# Altium PCB PCB4.PcbDoc
Units mm, origin at the board's own origin, x right, y up, seen from the top; angles counter-clockwise.
Board outline 152.4 x 101.6 mm, 2 copper layers (Top Layer, Bottom Layer); 15 components, 16 nets, 71 pads, 10 vias.
Unrouted connection lines stored in the file: 1.
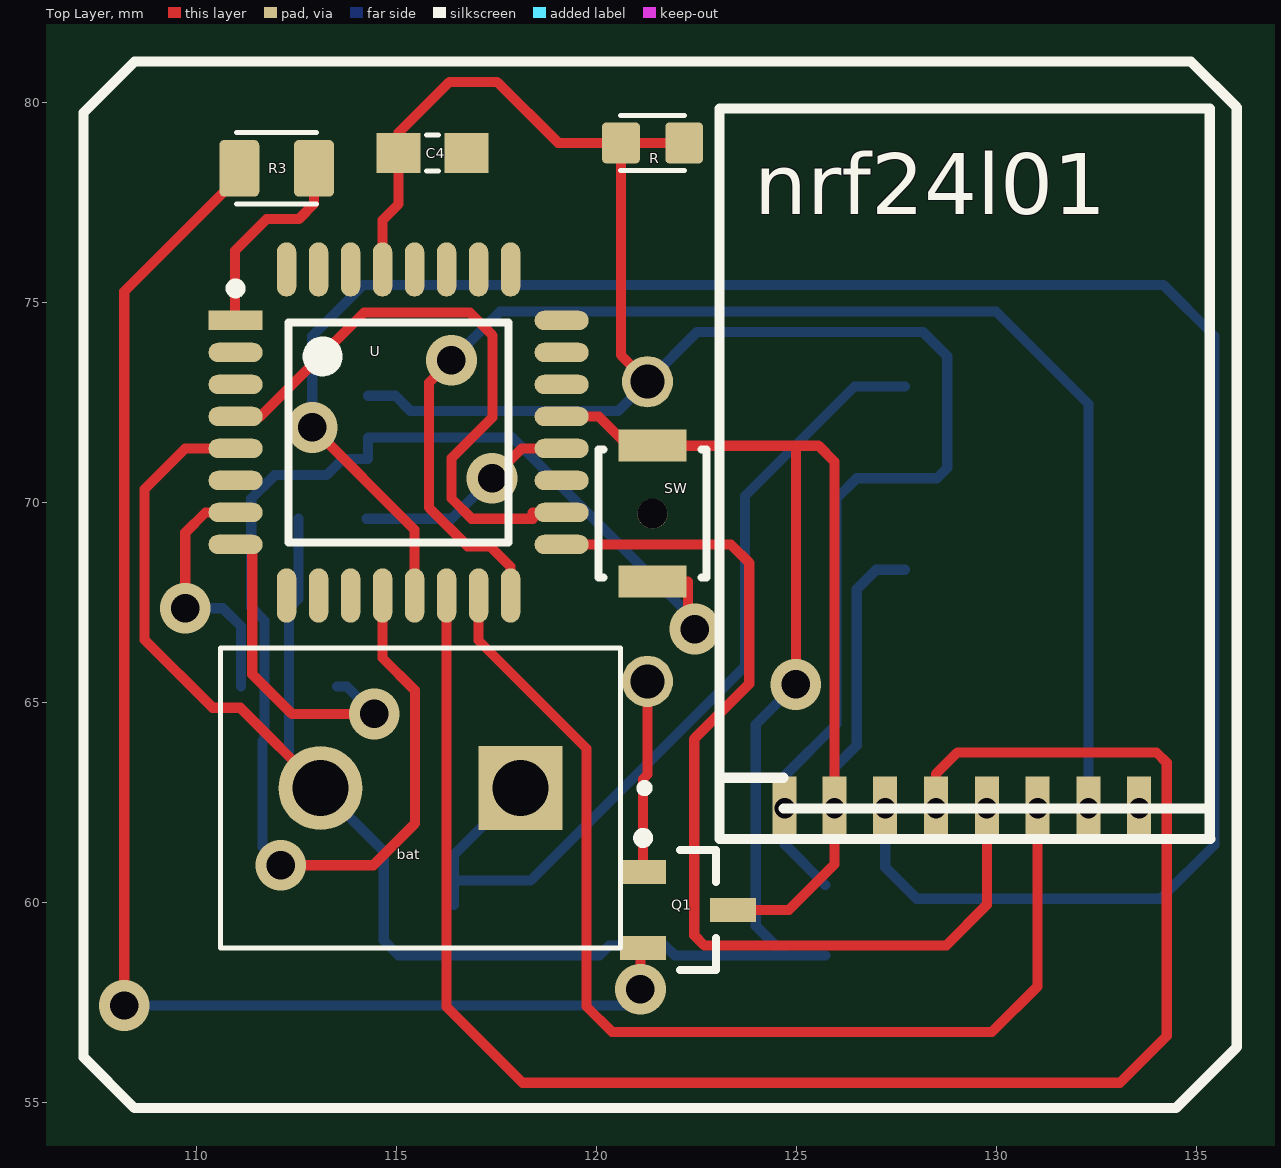
[diagram p0: Top Layer view]
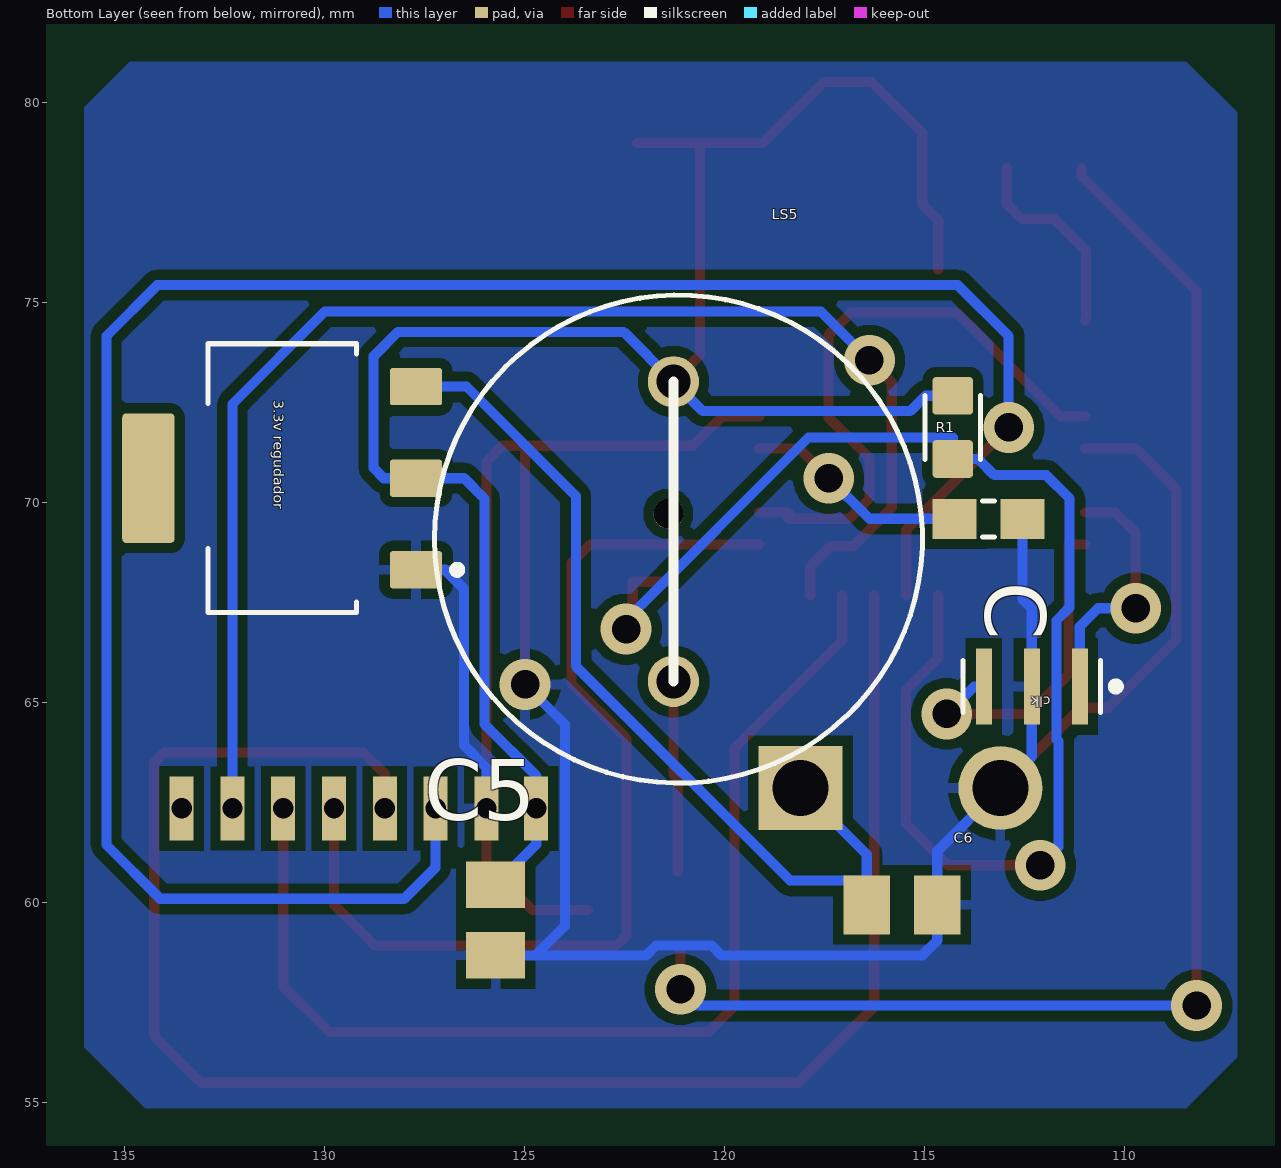
[diagram p1: Bottom Layer view, seen from below]
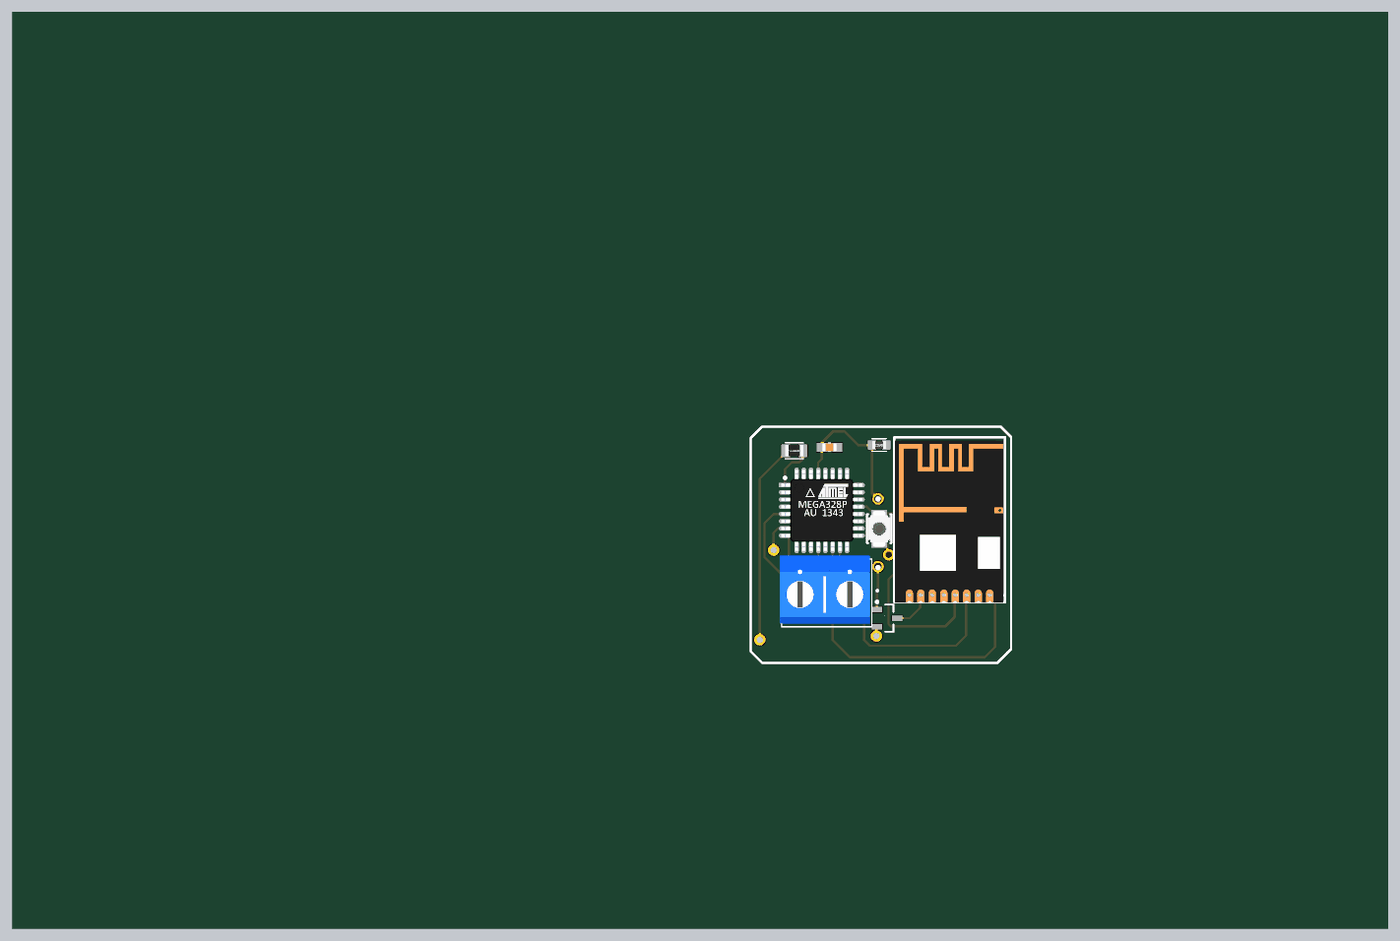
[diagram p2: 3D render of the assembled board from above, using the file's embedded part models]
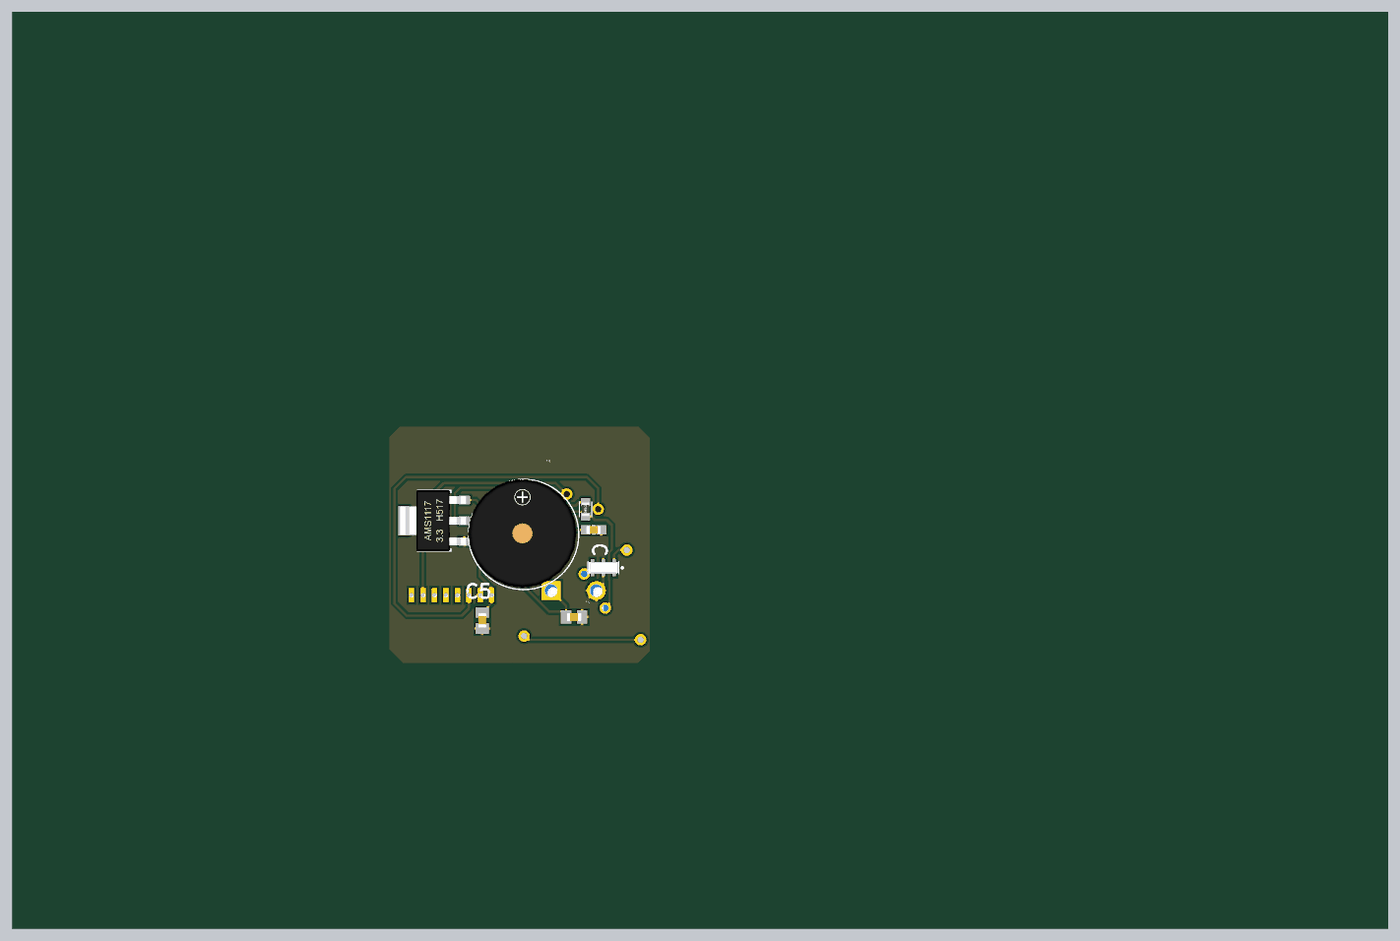
[diagram p3: 3D render of the assembled board from below, using the file's embedded part models]

## Layer stack, top to bottom
Top Solder: solder mask 0.0102, Solder Resist, Dk 3.5
Top Layer: signal copper 0.0356
Dielectric 1: dielectric 0.32, FR-4, Dk 4.8
Bottom Layer: signal copper 0.0356
Bottom Solder: solder mask 0.0102, Solder Resist, Dk 3.5

## Board outline
25.4,25.4 177.8,25.4 177.8,127 25.4,127

## Design rules (kind name [scope] priority, off if disabled: settings)
Clearance [All] p1: gap=0.254 ignorepadtopadclearanceinfootprint=FALSE except(0: Arc-Hole Track-Hole SMDPad-Hole THPad-Hole Via-Hole Fill-Hole Poly-Hole Region-Hole Text-Hole)
PolygonConnect [All] p1: connectstyle=Relief reliefconductorwidth=0.254 reliefentries=4 polygonreliefangle="90 Angle" airgapwidth=0.254
RoutingVias [All] p1: holewidth=0.711 width=1.27 viastyle="Through Hole" minholewidth=0.711 minwidth=1.27 maxholewidth=0.711 maxwidth=1.27
SolderMaskExpansion [All] p1: expansion=0.102 istentingtop=FALSE
Width [All] p1: maxlimit=0.254 minlimit=0.254 preferedwidth=0.254
30 further rules are at their usual default settings.

## Components (designator, comment, footprint, x,y, rotation, side; value= is the part's Value field where it differs from the comment)
"3.3v regudador" "AMS1117-3.3" SOT229P700X180-4N 131.064,70.612 r90 bottom
bat "KF301-2P" HANDSON_KF301-2P 115.61,62.865 r180 top (schematic designator J)
C "CC0603KRX7R9BB104" CAPC1608X90 113.411,69.596 r180 bottom
C4 "CC0603KRX7R9BB104" CAPC1608X90 115.912,78.74 r0 top
C5 "0805YC103J4T2A" CAPC2012X94N 125.73,59.563 r90 bottom
C6 "0805YC103J4T2A" CAPC2012X94N 115.57,59.944 r0 bottom
clk "clock" OSC_CSTCE8M00G52-R0 112.325,65.405 r0 bottom (schematic designator Y1)
LS5 "PS1240P02BT" XDCR_PS1240P02BT 121.158,69.088 r270 bottom
nrf24l01 "SMD" NRF24L01 124.689,61.595 r90 top
Q1 "QNPN" SOT-23B_N 122.301,59.817 r0 top
R "RP73D1J13RBTDG" RESC1608X50N 121.412,78.994 r180 top
R1 "RP73D1J13RBTDG" RESC1608X50N 114.3,71.882 r90 bottom
R3 "2-2176053-0" RESC2012X65N 112.014,78.359 r180 top
SW "B3U-1000P-B" Omron_0_MFG 121.412,69.723 r270 top
U "ATMEGA328PB-AUR" Microchip_C04-074_IPC_C 115.062,71.755 r0 top (schematic designator U?)

## Footprints (in the part's own frame and the unit in brackets; to place one, negate y for a bottom-side part, rotate by r counter-clockwise, add the part's x,y. Pads: shape width x height; smd on the part's side, far side on the other; paste and mask are expansions set on the pad)
CAPC1608X90 [mm]
  rect 1.1x1 smd: 1(-0.85,0) 2(0.85,0)
  silkscreen extent -0.15,-0.45 0.15,0.45, body extent -0.8,-0.45 0.8,0.45, height 0.79
CAPC2012X94N [mm]
  rect 1.16x1.47 smd: 1(-0.88,0) 2(0.88,0)
  body extent -0.8,-0.45 0.8,0.45, height 0.79
HANDSON_KF301-2P [mm]
  rect 2.1x2.1 hole 1.4: 1(-2.5,0)
  round 2.1 hole 1.4: 2(2.5,0)
  silkscreen extent -5.7,-3.5 5,4, body extent -4.79,-3.88 5.21,3.62, height 10.03
Microchip_C04-074_IPC_C [mm]
  rect 1.355x0.486 smd paste+0 mask+0: 1(-4.075,2.8)
  rrect100% 1.355x0.486 smd paste+0 mask+0: 2(-4.075,2) 3(-4.075,1.2) 4(-4.075,0.4) 5(-4.075,-0.4) 6(-4.075,-1.2) 7(-4.075,-2) 8(-4.075,-2.8) 17(4.075,-2.8) 18(4.075,-2) 19(4.075,-1.2) 20(4.075,-0.4) 21(4.075,0.4) 22(4.075,1.2) 23(4.075,2) 24(4.075,2.8)
  rrect100% 0.486x1.355 smd paste+0 mask+0: 9(-2.8,-4.075) 10(-2,-4.075) 11(-1.2,-4.075) 12(-0.4,-4.075) 13(0.4,-4.075) 14(1.2,-4.075) 15(2,-4.075) 16(2.8,-4.075) 25(2.8,4.075) 26(2,4.075) 27(1.2,4.075) 28(0.4,4.075) 29(-0.4,4.075) 30(-1.2,4.075) 31(-2,4.075) 32(-2.8,4.075)
  silkscreen extent -4.2,-2.75 2.75,3.72, body extent -4.5,-4.5 4.5,4.5, height 1
NRF24L01 [mil] "smd"
  rect 62.99x23.62 hole 20: 1(30,-1) 2(30,-49.99) 3(30,-100) 4(30,-150) 5(30,-200) 6(30,-250) 7(30,-300) 8(30,-350)
  silkscreen extent 0,-420 719,63, body extent -3,-412 706,60, height 32
Omron_0_MFG [mm]
  rect 0.8x1.7 smd paste+0 mask+0: 1(-1.7,0) 2(1.7,0)
  round 0.75 hole 0.75 unplated paste-1000 mask+0: ""(0,0)
  silkscreen extent -1.6,-1.35 1.6,1.35, body extent -2,-1.25 2,1.25, height 2
OSC_CSTCE8M00G52-R0 [mm]
  rect 0.4x1.9 smd: 1(-1.2,0) 2(0,0) 3(1.2,0)
  silkscreen extent -2.2,-0.65 1.72,0.65, body extent -1.6,-0.65 1.6,0.65, height 0.8
RESC1608X50N [mm]
  rrect20% 0.94x1.02 smd: 1(-0.79,0) 2(0.79,0)
  silkscreen extent -0.8,-0.69 0.8,0.69, body extent -0.78,-0.43 0.78,0.43, height 0.49
RESC2012X65N [mm]
  rrect25% 1x1.42 smd: 1(-0.935,0) 2(0.935,0)
  silkscreen extent -1,-0.89 1,0.89, body extent -1,-0.62 1,0.62, height 0.6
SOT229P700X180-4N [mm]
  rrect15% 0.93x1.31 smd: 1(-2.29,-3.345) 2(0,-3.345) 3(2.29,-3.345)
  rrect15% 3.24x1.31 smd: 4(0,3.345)
  silkscreen extent -3.36,-4.47 3.36,1.86, body extent -3.36,-3.52 3.35,3.78, height 1.91
SOT-23B_N [mm] "SOT23, 3-Leads, Body 2.9x1.3mm, Pitch 0.95mm, Lead Span 2.4mm, IPC Medium Density"
  rect 1.15x0.6 smd: 1(-1.125,0.95) 2(-1.125,-0.95) 3(1.125,0)
  silkscreen extent -1.25,-1.5 0.7,1.92, body extent -0.7,-1.5 0.7,1.5, height 1.14
XDCR_PS1240P02BT [mm]
  round 1.28 hole 0.85: 1(-3.937,-0.127) 2(3.556,-0.127)
  silkscreen extent -6.1,-6.1 6.1,6.1, body extent -6.13,-6.13 5.87,5.87, height 9.6

## Part data
"3.3v regudador": "Sot223/Pkg 1-Amp 3.3-Volt Low Drop Out Voltage Regulatator", Package=None, Availability=Unavailable, MF="Advanced Monolithic Systems", MP=AMS1117-3.3, Price=None, SnapEDA_Link=https://www.snapeda.com/parts/AMS1117-3.3/Advanced%20Monolithic%20Systems/view-part/53450/?ref=snap
bat: "2 Pin Terminal Block 5mm Pitch", Package=Package, Availability=Unavailable, MF="Handson Technology", MP=KF301-2P, Price=None, SnapEDA_Link=https://www.snapeda.com/parts/KF301-2P/Handson%20Technology/view-part/4276957/?ref=snap
C C4: "0.1ÂµF Â±10% 50V Ceramic Capacitor X7R 0603 _1608 Metric_", Package="0603 Yageo", Digi-Key_Part_Number=311-1344-1-ND, Digi-Key_Purchase_URL=https://www.digikey.com/product-detail/en/yageo/CC0603KRX7R9BB104/311-1344-1-ND/2103128?utm_source=snapeda&utm_medium=aggregator&utm_campaign=symbol, MF=Yageo, MP=CC0603KRX7R9BB104, SnapEDA_Link=https://www.snapeda.com/parts/CC0603KRX7R9BB104/Yageo/view-part/78680/?ref=snap
C5 C6: "10000pF Â±5% 16V Ceramic Capacitor X7R 0805 _2012 Metric_", Package="2012 AVX", Availability=Unavailable, MF=AVX, MP=0805YC103J4T2A, Price=None, SnapEDA_Link=https://www.snapeda.com/parts/0805YC103J4T2A/AVX/view-part/606803/?ref=snap
clk: library part CSTCE8M00G52-R0, "8MHz Ceramic Resonator Built in Capacitor 10pF Â±0.2% -20Â°C ~ 80Â°C Surface Mount", Package="Surface Mount Murata Electronics North America", Availability=Bad, Check_prices=https://www.snapeda.com/parts/CSTCE8M00G52-R0/Murata%20Electronics%20North%20America/view-part/234504/?ref=eda, MF=Murata, MP=CSTCE8M00G52-R0, Price=None, SnapEDA_Link=https://www.snapeda.com/parts/CSTCE8M00G52-R0/Murata%20Electronics%20North%20America/view-part/234504/?ref=snap
LS5: "Buzzers Transducer, Externally Driven Piezo 3V 4kHz 60dB @ 3V, 10cm Through Hole PC Pins", Package="2020 TDK", Availability=Unavailable, MF=TDK, MP=PS1240P02BT, Price=None, SnapEDA_Link=https://www.snapeda.com/parts/PS1240P02BT/TDK/view-part/53420/?ref=snap
nrf24l01: library part nrf24l01_smd, Supplier Part Number 1=311-0.0ERCT-ND, Supplier 1=Digi-Key
Q1: "NPN Bipolar Transistor", LatestRevisionDate=29-May-2009, LatestRevisionNote="IPC-7351 Footprint Added.", PackageDescription="3-Pin SOT-23 Package 0.95 mm Pitch, 2.4 mm Lead Span", PackageReference=SOT-23B, PackageVersion=Aug-1999, Published=8-Jun-2000, Publisher="Altium Limited"
R R1: "Res, Thin Film, 13r, 0.1%, 0.1w, 0603", Package="0603 TE Connectivity / AMP", Availability=Unavailable, MF="TE Connectivity", MP=RP73D1J13RBTDG, Price=None, SnapEDA_Link=https://www.snapeda.com/parts/RP73D1J13RBTDG/TE%20Connectivity/view-part/970906/?ref=snap, TE_purchase_URL=https://www.te.com/usa-en/product-RP73D1J13RBTDG.html?te_bu=Cor&te_type=disp&te_campaign=seda_glo_cor-seda-global-disp-prtnr-fy19-seda-model-bom-cta_sma-317_1&elqCampaignId=32493
R3: "RES 0.33 OHM 1% 1/4W 0805", Package=0805, Power_Rating=".25 W", Resistance=.33, Tolerance=1%, Availability=Unavailable, EU_RoHS_Compliance="Compliant with Exemptions", MF="TE Connectivity", MP=2-2176053-0, Price=None, SnapEDA_Link=https://www.snapeda.com/parts/2-2176053-0/TE%20Connectivity/view-part/2214508/?ref=snap

## Via types
v1: diameter 1.27, hole 0.711, Top Layer to Bottom Layer, 10 vias

## Nets (pads, with @x,y where several pads share a name; then routed paths per layer and width w, separated by ;. In a path a pad name is that pad's centre, name@x,y a point inside that pad or via, vN(x,y) a via of type N, cw(c..) or ccw(c..) an arc to the next point about the centre after c; other vN are vias at no path point)
3v3: "3.3v regudador.2" C4.1 C5.2 LS5.1 nrf24l01.1 R1.2 R.1 R.2 U.29 | length 50.3
  Top Layer w0.254: U.29 114.662,77.064 115.062,77.464 C4.1 115.062,79.248 116.332,80.518 117.526,80.518 119.05,78.994 R.2 ; LS5.1 120.622,73.688 R.2 ; R.1 R.2
  Bottom Layer w0.254: R1.2 114.983,72.672 115.367,72.288 120.548,72.288 LS5.1 122.53,74.27 128.168,74.27 128.778,73.66 128.778,70.866 128.524,70.612 127.719,70.612 126.517,70.612 126.009,70.104 126.009,64.465 124.714,63.17 nrf24l01.1 124.714,61.459 C5.2
GND: "3.3v regudador.1" bat.2 C4.2 C5.1 C6.1 C.2 clk.2 nrf24l01.2 Q1.3 SW.1 U.5 U.21 | length 76.4
  Top Layer w0.254: U.5 109.728,71.355 108.712,70.339 108.712,66.573 110.414,64.872 111.103,64.872 bat.2 ; U.21 120.066,72.155 120.798,71.423 SW.1 124.968,71.423 ; Q1.3 124.815,59.817 125.958,60.96 nrf24l01.2 125.958,71.027 125.562,71.423 124.968,71.423 ; v1(124.993,65.456) 124.993,71.398 124.968,71.423
  Bottom Layer w0.254: C.2 112.561,67.597 112.325,67.361 clk.2 112.325,63.65 bat.2 114.69,61.285 C6.1 114.69,59.055 115.062,58.683 120.084,58.683 120.329,58.928 121.721,58.928 121.966,58.683 124.73,58.683 ; v1(124.993,65.456) 123.993,64.455 123.993,59.421 124.73,58.683 ; C5.1 124.73,58.683 ; nrf24l01.2 125.958,63.373 126.517,63.932 126.517,67.839 127,68.322 127.719,68.322
"Net3.3v regudador_3": "3.3v regudador.3" bat.1 C6.2 | length 22.5
  Bottom Layer w0.254: C6.2 C6.2@116.45,60.554 ; bat.1 116.45,61.205 C6.2@116.45,60.554 ; 127.719,72.902 126.459,72.902 123.723,70.167 123.723,65.913 118.364,60.554 C6.2@116.45,60.554
NetC_1: C.1 U.20 | length 5.6
  Top Layer w0.254: v1(117.399,70.612) 118.142,71.355 U.20
  Bottom Layer w0.254: C.1 116.383,69.596 v1(117.399,70.612)
NetLS5_2: LS5.2 Q1.1 | length 4.8
  Top Layer w0.254: Q1.1 121.176,63.094 121.285,63.203 LS5.2
Netnrf24l01_3: nrf24l01.3 U.13 | length 54.5
  Top Layer w0.254: v1(112.903,71.882) 115.462,69.323 U.13
  Bottom Layer w0.254: v1(112.903,71.882) 112.903,74.168 114.173,75.438 134.188,75.438 135.458,74.168 135.458,61.443 134.112,60.096 128.016,60.096 127.229,60.884 nrf24l01.3
Netnrf24l01_4: nrf24l01.4 U.14 | length 43.3
  Top Layer w0.254: U.14 116.262,57.398 118.161,55.499 133.096,55.499 134.264,56.667 134.264,63.5 134.01,63.754 129.032,63.754 128.499,63.221 nrf24l01.4
Netnrf24l01_5: nrf24l01.5 U.17 | length 25
  Top Layer w0.254: U.17 123.369,68.955 123.83,68.494 123.83,65.471 122.453,64.095 122.453,59.182 122.707,58.928 128.753,58.928 129.769,59.944 nrf24l01.5
Netnrf24l01_6: nrf24l01.6 U.15 | length 27.9
  Top Layer w0.254: U.15 117.062,66.555 119.761,63.856 119.761,57.404 120.396,56.769 129.896,56.769 131.039,57.912 nrf24l01.6
Netnrf24l01_7: nrf24l01.7 U.16 | length 34.8
  Top Layer w0.254: v1(116.383,73.558) 115.824,73 115.824,69.875 116.789,68.91 117.348,68.91 117.862,68.396 U.16
  Bottom Layer w0.254: v1(116.383,73.558) 117.602,74.778 129.997,74.778 132.309,72.466 nrf24l01.7
NetQ1_2: Q1.2 R3.2 | length 36.4
  Top Layer w0.254: v1(108.204,57.429) 108.204,75.281 111.079,78.156 R3.2 ; v1(121.107,57.836) 121.107,58.867 Q1.2
  Bottom Layer w0.254: v1(108.204,57.429) 120.701,57.429 v1(121.107,57.836)
  Bottom Layer w0.8: v1@120.98,57.836 v1(121.107,57.836)
NetR1_1: R1.1 SW.2 U.12 | length 35.6
  Top Layer w0.254: v1(112.116,60.935) 114.427,60.935 115.468,61.976 115.468,65.31 114.662,66.116 U.12 ; SW.2 122.301,68.023 122.301,67.005 v1(122.466,66.84)
  Bottom Layer w0.254: v1(112.116,60.935) 111.658,61.392 111.658,64.033 111.709,64.084 111.709,67.056 111.379,67.386 111.379,70.104 111.963,70.688 113.261,70.688 113.665,71.092 R1.1 114.3,71.628 117.907,71.628 122.466,67.069 v1(122.466,66.84)
NetR3_1: R3.1 U.1 | length 5.1
  Top Layer w0.254: U.1 110.973,74.555 110.973,76.302 111.76,77.089 112.568,77.089 112.949,77.47 R3.1
NetU?_4: U.4 U.18 | length 15.4
  Top Layer w0.254: U.4 111.608,72.155 114.205,74.752 116.84,74.752 117.41,74.182 117.41,72.136 116.383,71.109 116.383,70.104 116.891,69.596 118.415,69.596 118.415,69.755 U.18
NetU?_7: clk.1 U.7 | length 6.4
  Top Layer w0.254: v1(109.728,67.361) 109.728,69.247 110.236,69.755 U.7
  Bottom Layer w0.254: v1(109.728,67.361) 110.668,67.361 111.125,66.904 clk.1
NetU?_8: clk.3 U.8 | length 8.3
  Top Layer w0.254: U.8 111.404,68.955 111.404,65.71 112.395,64.719 v1(114.452,64.719)
  Bottom Layer w0.254: clk.3 113.767,65.405 v1(114.452,64.719)
pads on no net: "3.3v regudador.4" nrf24l01.8 SW. U.2 U.3 U.6 U.9 U.10 U.11 U.19 U.22 U.23 U.24 U.25 U.26 U.27 U.28 U.30 U.31 U.32

## Polygon pours and split planes (outlines as drawn)
GND on Bottom Layer "GND_L02_P000" (solid, pour order 0): 107.188,79.756 108.458,81.026 134.874,81.026 136.017,79.883 136.017,56.388 134.493,54.864 108.458,54.864 107.188,56.134

## Silkscreen, mask and mechanical layers (free items; w line width, h text height)
Top Overlay:
  lines w0.254: 107.188,56.134 107.188,79.756 108.458,81.026 109.855,81.026 134.874,81.026 136.017,79.883 136.017,56.388 134.493,54.864 108.458,54.864 107.188,56.134